# Altium PCB Layout.PcbDoc
Units mil, origin at the board's own origin, x right, y up, seen from the top; angles counter-clockwise.
Board outline 1385.83 x 2275 mil, 2 copper layers (Top Layer, Bottom Layer); 27 components, 50 nets, 138 pads, 73 vias.
Unrouted connection lines stored in the file: 1.
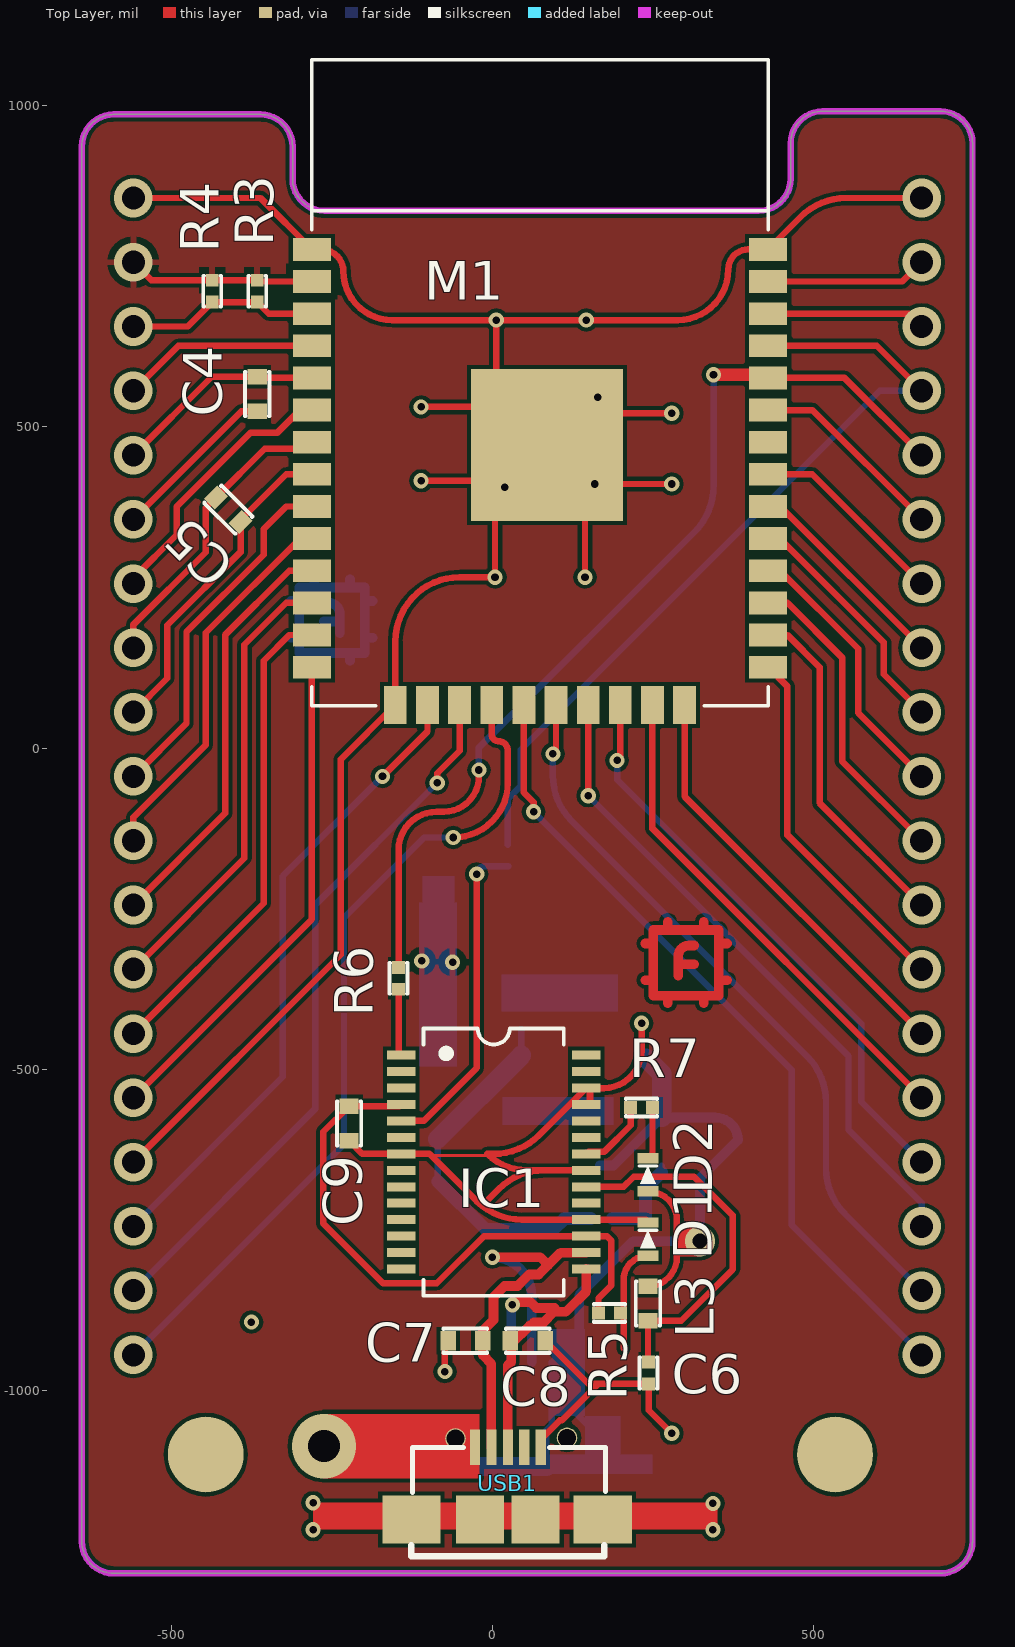
[diagram p0: Top Layer view]
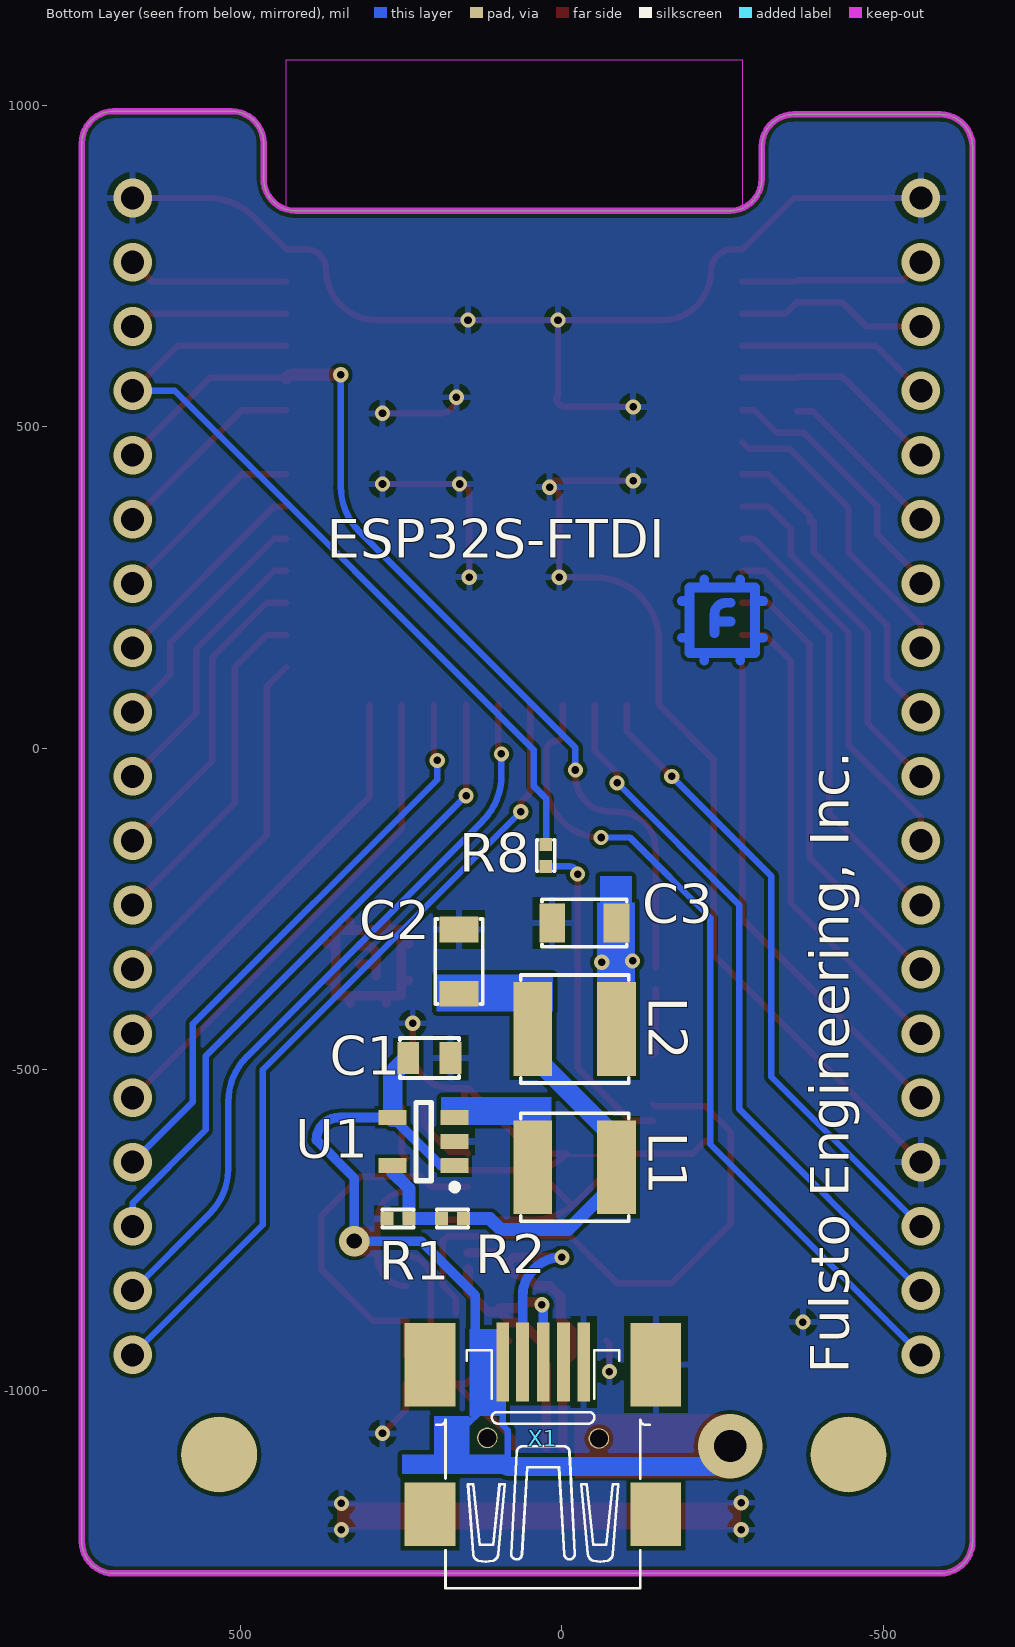
[diagram p1: Bottom Layer view, seen from below]
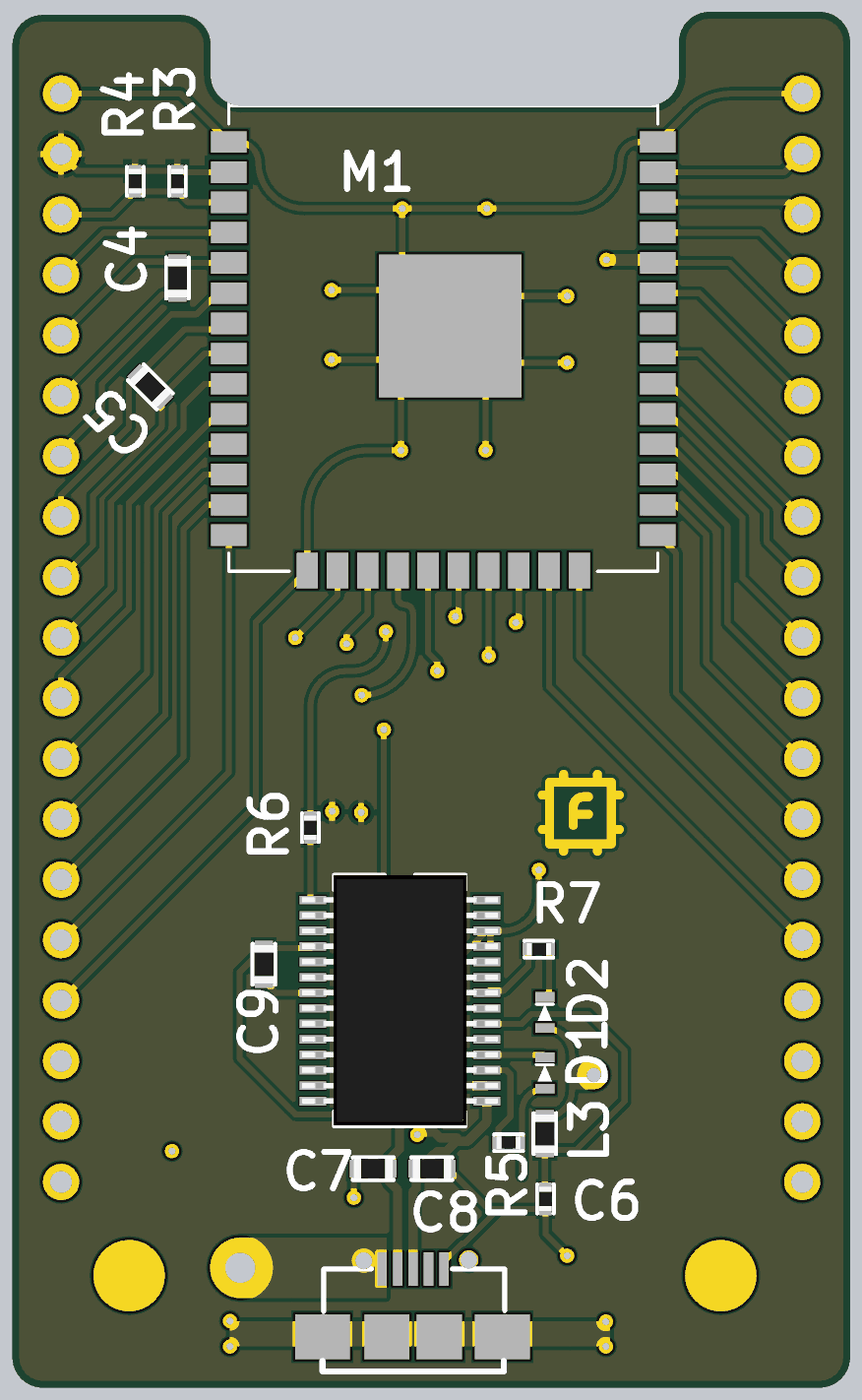
[diagram p2: 3D render of the assembled board from above, using the file's embedded part models]
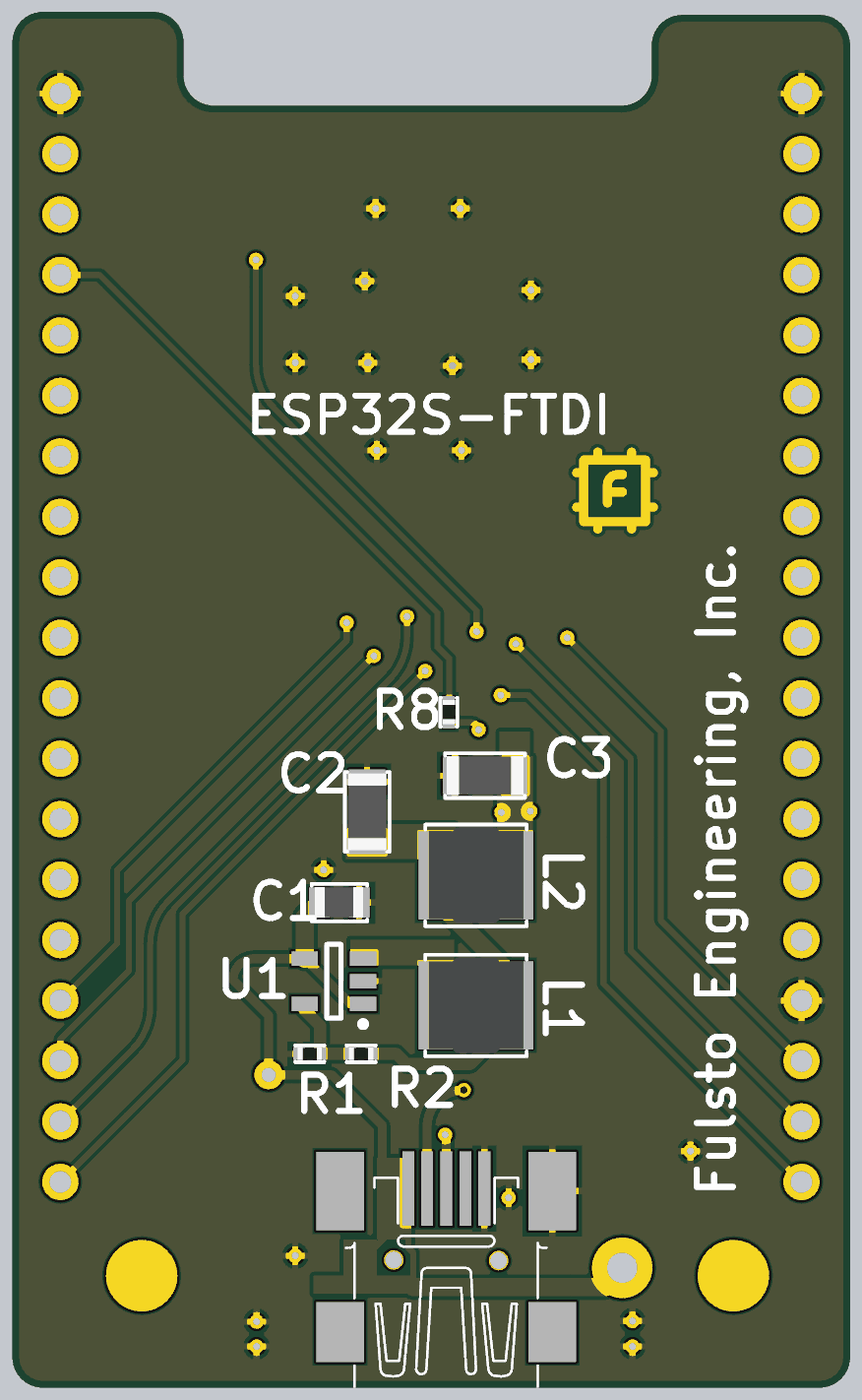
[diagram p3: 3D render of the assembled board from below, using the file's embedded part models]

## Layer stack, top to bottom
Top Solder: solder mask 0.4, Solder Resist, Dk 3.5
Top Layer: signal copper 1.4
Dielectric 1: dielectric 12.6, FR-4, Dk 4.8
Bottom Layer: signal copper 1.4
Bottom Solder: solder mask 0.4, Solder Resist, Dk 3.5

## Board outline
-638.91,-1234 -638.91,936 cw(c-588.91,936) -588.91,986 -361,986 cw(c-361,936) -311,936 -311,886 ccw(c-261,886) -261,836 414,836 ccw(c414,886) 464,886 464,941 cw(c514,941) 514,991 696.91,991 cw(c696.91,941) 746.91,941 746.91,-1234 cw(c696.91,-1234) 696.91,-1284 -588.91,-1284 cw(c-588.91,-1234)

## Design rules (kind name [scope] priority, off if disabled: settings)
Clearance [All] p1: gap=6
DiffPairsRouting [All] p1: maxlimit=10 minlimit=10 mostfreqgap=10 toplayer_minwidth=15 toplayer_maxwidth=15 toplayer_prefwidth=15 bottomlayer_minwidth=15 bottomlayer_maxwidth=15 bottomlayer_prefwidth=15 maxuncoupledlength=500
PolygonConnect [All] p1: connectstyle=Relief reliefconductorwidth=10 reliefentries=4 polygonreliefangle="90 Angle" airgapwidth=10
RoutingVias [All] p1: holewidth=11.81 width=23.62 viastyle="Through Hole" minholewidth=11.81 minwidth=11.81 maxholewidth=236.22 maxwidth=118.11
SolderMaskExpansion [All] p1: expansion=4
Width [All] p1: maxlimit=3897.64 minlimit=10 preferedwidth=10 minimp=50.000000 maximp=50.000000 favimp=50.000000
29 further rules are at their usual default settings.

## Classes and differential pairs
differential pair USB: +USB_P -USB_N

## Components (designator, comment, footprint, x,y, rotation, side; value= is the part's Value field where it differs from the comment)
C1 "4.7µF" 0805NT 206,-482 r270 bottom
C2 "22µF" 1206NT 160,-332 r0 bottom
C3 "22µF" 1206NT -35,-272 r270 bottom
C4 "270pF" 0603NT -366,551 r0 top
C5 "270pF" 0603NT -411,371 r225 top
C6 "1uF" 0402NT 243,-972 r0 top
C7 "47pF" 0603NT -42,-922 r270 top
C8 "47pF" 0603NT 55,-922 r90 top
C9 "0.1uF" 0603NT -223,-584 r0 top
D1 "SMT_LED" 0603(IN)LED 242,-764 r90 top
D2 "SMT_LED" 0603(IN)LED 242,-664 r90 top
IC1 "FT232R" SSOP-28 2,-644 r0 top
L1 "2.2µH" IND-NR4018 -20,-652 r90 bottom
L2 "2.2µH" IND-NR4018 -20,-437 r90 bottom
L3 "Z=1.5k" 0603NT 242,-864 r0 top
M1 "ESP32S_Module" ESP32S -281,66 r0 top
R1 "30kΩ" 0402NT 255,-732 r90 bottom
R2 "135kΩ" 0402NT 170,-732 r90 bottom
R3 "1K" 0402NT -436,711 r0 top
R4 "1K" 0402NT -366,711 r0 top
R5 "1KΩ" 0402NT 182,-879 r270 top
R6 "1k" 0402NT -146,-358 r180 top
R7 "1k" 0402NT 232,-559 r270 top
R8 "1k" 0402NT 25,-167 r0 bottom
U1 "AP3418K" "AP3418K SOT25" 215,-612 r0 bottom
USB1 "µUSB AB" "Micro USB A/B" 24,-1200 r0 top
X1 "MINI-USB-32005-201" 32005-201 29,-1074 r90 bottom

## Footprints (in the part's own frame and the unit in brackets; to place one, negate y for a bottom-side part, rotate by r counter-clockwise, add the part's x,y. Pads: shape width x height; smd on the part's side, far side on the other; paste and mask are expansions set on the pad)
0402NT [mil]
  rect 20x20 smd mask+2: 1(0,17) 2(0,-17)
  silkscreen extent -14,-24 14,24, body extent -10,-20 10,20, height 14
0603(IN)LED [mil] "0603(IN)LED"
  rect 16x32 smd: P$1(-25.59,0) P$2(26,0)
  silkscreen extent -14,-14 14,14, body extent -30,-19 30,19, height 20
0603NT [mil]
  rect 30x24 smd mask+2: 1(0,27) 2(0,-27)
  silkscreen extent -19,-34 19,34, body extent -16,-32 16,32, height 18
0805NT [mil]
  rect 50x34 smd mask+2: 1(0,33) 2(0,-33)
  silkscreen extent -31,-46 31,46, body extent -26,-41 24,39, height 24
1206NT [mil]
  rect 60x40 smd: 1(0,50) 2(0,-50)
  silkscreen extent -37,-66 37,66, body extent -32,-63 32,63, height 24
32005-201 [mil] "32005-201"
  rect 123x20 smd: 1(119,63) 2(119,32) 3(119,0) 4(119,-31.5) 5(119,-62.99)
  rect 99x79 smd: M1(-118.11,-175.2) M2(-118.11,176)
  rect 130x79 smd: M3(115,176) M4(115,-175.2)
  round 32 hole 28: P$1(1,87) P$2(-0.1,-86.52)
  silkscreen extent -233,-166 137,166
"AP3418K SOT25" [mm] "SOT23, 5-Leads, Body 2.96x2.82mm, Pitch 0.95mm, IPC Medium Density"
  rect 1.1x0.6 smd: 1(-1.225,0.95) 2(-1.225,0) 3(-1.225,-0.95) 4(1.225,-0.95) 5(1.225,0.95)
  silkscreen extent -1.35,-1.55 0.3,1.92, body extent -0.85,-1.55 0.85,1.55, height 1.45
ESP32S [mm] "ESP32S-Module"
  rect 1.5x0.9 smd: 1(0,18.034) 2(0,16.764) 3(0,15.494) 4(0,14.224) 5(0,12.954) 6(0,11.684) 7(0,10.414) 8(0,9.144) 9(0,7.874) 10(0,6.604) 11(0,5.334) 12(0,4.064) 13(0,2.794) 14(0,1.524) 25(18.034,1.524) 26(18.034,2.794) 27(18.034,4.064) 28(18.034,5.334) 29(18.034,6.604) 30(18.034,7.874) 31(18.034,9.144) 32(18.034,10.414) 33(18.034,11.684) 34(18.034,12.954) 35(18.034,14.224) 36(18.034,15.494) 37(18.034,16.764) 38(18.034,18.034)
  rect 0.9x1.5 smd: 15(3.3,0.034) 16(4.57,0.034) 17(5.84,0.034) 18(7.11,0.034) 19(8.38,0.034) 20(9.65,0.034) 21(10.92,0.034) 22(12.19,0.034) 23(13.46,0.034) 24(14.73,0.034)
  rect 6x6 smd: 101(9.3,10.3)
  Keep-Out Layer region: 0,19.558 18.034,19.558 18.034,25.527 0,25.527
  silkscreen extent 0,0 18.03,25.53, body extent 0,0 18.03,25.53, height 2
IND-NR4018 [mil] "Power Inductance  TAIYO YUDEN"
  rect 146x60 smd paste+0 mask+2: 1(0,65) 2(0,-65)
  silkscreen extent -84,-84 84,84, body extent -79,-79 79,79, height 70
"Micro USB A/B" [mm]
  rect 0.4x1.4 smd: 1(-1.3,2.85) 2(-0.65,2.85) 3(0,2.85) 4(0.65,2.85) 5(1.3,2.85)
  rect 2.3x1.9 smd: 5(-3.81,0) 5(3.75,0)
  rect 1.9x1.9 smd: 5(-1.1,0) 5(1.1,0)
  silkscreen extent -3.81,-1.45 3.85,2.85, body extent -4.44,-2.92 4.44,2.85, height 2.05
SSOP-28 [mil]
  rect 44x14 smd mask+2: 1(-144,166.4) 2(-144,140.8) 3(-144,115.2) 4(-144,89.6) 5(-144,64) 6(-144,38.4) 7(-144,12.8) 8(-144,-12.8) 9(-144,-38.4) 10(-144,-64) 11(-144,-89.6) 12(-144,-115.2) 13(-144,-140.8) 14(-144,-166.4) 15(144,-166.4) 16(144,-140.8) 17(144,-115.2) 18(144,-89.6) 19(144,-64) 20(144,-38.4) 21(144,-12.8) 22(144,12.8) 23(144,38.4) 24(144,64) 25(144,89.6) 26(144,115.2) 27(144,140.8) 28(144,166.4)
  silkscreen extent -109,-208 109,208, body extent -161,-206 162,207, height 76

## Part data
C1 C2 C3 C4 C5 C6 C7 C8 C9: library part CAP, "Capacitor"
IC1: library part FT232RL, "IC Logic Comm"
L1 L2: library part IND-POWER, "Inductance Power"
L3: library part IND_BEAD, "Inductance Bead"
M1: "Esp-32S"
R1 R2 R5: library part ResNico
R3 R4 R6 R7 R8: library part RES, "Resistance"
USB1: library part "Micro USB A/B"
X1: "<b>MINI USB-B Conector</b><p> / Source: www.cypressindustries.com"

## Free pads (board coordinates)
  round 118.11 all layers, no hole: 0(-446,-1099) 0(533.13,-1099)

## Via types
v1: diameter 60, hole 36, Top Layer to Bottom Layer, 38 vias
v2: diameter 23.62, hole 11.81, Top Layer to Bottom Layer, 33 vias
v3: diameter 100, hole 50, Top Layer to Bottom Layer, 1 vias
v4: diameter 47.24, hole 23.62, Top Layer to Bottom Layer, 1 vias

## Nets (pads, with @x,y where several pads share a name; then routed paths per layer and width w, separated by ;. In a path a pad name is that pad's centre, name@x,y a point inside that pad or via, vN(x,y) a via of type N, cw(c..) or ccw(c..) an arc to the next point about the centre after c; other vN are vias at no path point)
3V3: C3.1 L2.2 M1.2 R3.1 R4.1 | length 290
  Top Layer w10: v1(-558.56,756) -530.56,728 R3.1 R4.1 -364,726 M1.2
  other v2: -62,-333 -110,-331
5V: C1.2 D2.P$1 L3.1 U1.1 U1.4 USB1.1 X1.1 X1.P$2 | length 1820
  Top Layer w10: L3.1 ccw(c242,-792) 287,-792 287,-734.59 ccw(c242,-734.59) D2.P$1
  Bottom Layer w10: 84,-1119 154,-1119 189,-1084 179,-1084 X1.1@94,-999 ; 84,-1117.85 84,-1061.38 92,-1053.38 X1.1
  Bottom Layer w15: 136,-922 135,-921 135,-851 219,-767 v4(323,-767) 323,-669 382,-610 ccw(c346.6,-610) 346.6,-574.6 U1.4 188.43,-649.4 U1.1
  Bottom Layer w29.53: v3@-264.5,-1088.5 -235.15,-1117.85 84,-1117.85
  Bottom Layer w30: C1.2 263.23,-506.23 U1.4
  other v3: -262,-1086
CBUS1: IC1.22 R7.2 | length 115.2
  Top Layer w10: IC1.22 149.6,-627.6 174.21,-627.6 215,-586.81 R7.2
CLK: M1.20 | length 1138.1
  Top Layer w10: v2(94,-9) 98.92,-4.08 M1.20
  Bottom Layer w10: v2(94,-9) 94,-42.58 ccw(c194,-42.58) 123.29,-113.29 489.71,-479.71 cw(c419,-550.42) 519,-550.42 519,-653.8 ccw(c619,-653.8) 548.29,-724.51 v1(667.78,-844)
CMD: M1.19 | length 1267.7
  Top Layer w10: M1.19 48.92,-68.92 64,-84 v2(64,-99)
  Bottom Layer w10: v2(64,-99) 465.39,-500.39 465.39,-741.61 v1(667.78,-944)
EN: M1.3 R3.2 R4.2 | length 300.8
  Top Layer w10: v1(-558.56,656) -474,656 R3.2 R4.2 -348,676 M1.3
FRX-ESPTX: M1.35 R8.2 | length 1278.7
  Top Layer w10: M1.35 597.78,626 v1(667.78,556)
  Bottom Layer w10: R8.2@24,-150 24,-79 44,-59 44,-2.43 602.43,556 v1(667.78,556)
FTX-ESPRX: M1.34 R6.2 | length 1519.8
  Top Layer w10: R6.2 -146,-158 cw(c-87,-158) -87,-99 -76,-99 ccw(c-76,-44) -21,-44 v2(-21,-34) ; M1.34 547.78,576 v1(667.78,456)
  Top Layer w19.68: v2(344,581) 416.93,581 cw(c416.93,563.93) M1.34
  Bottom Layer w10: v2(-21,-34) -21,1 314.71,336.71 ccw(c244,407.42) 344,407.42 v2(344,581)
GND: C1.1 C2.2 C3.2 C6.2 C7.2 C8.2 C9.2 D1.P$2 IC1.7 IC1.18 IC1.21 IC1.25 IC1.26 M1.1 M1.15 M1.38 M1.101 R1.1 U1.2 USB1.5 X1.5 X1.M4 | length 5154.4
  Top Layer w10: v1(-558.56,-644) -236,-321.44 -236,-17.58 M1.15 -151.08,166 cw(c-51.08,166) -51.08,266 v2(4,266) 4,391 cw(c19,391) v2(19,406) ccw(c9,406) 9,416 v2(-111,416) ; v1(-558.56,856) -361,856 M1.1 -266,776 cw(c-266,742) -232,742 ccw(c-156,742) -156,666 v2(6,666) ; C9.2 -202.8,-631.2 IC1.7 -98,-631.2 -24.89,-704.31 ccw(c45.82,-633.6) -16.35,-711.92 ; v2(-111,531) -6,531 ccw(c-6,546) 9,546 cw(c9,549) 6,549 v2(6,666) ; v2(-74,-970) -74,-927 C7.2 ; USB1.5@75.18,-1087.8 75.18,-1075.64 104.82,-1046 108,-1046 165,-989 ; C8.2 149,-989 165,-989 ; v2(144,266) 144,396 cw(c159,396) v2(159,411) v2(279,411) ; IC1.21 80.19,-656.8 ; v2(164,546) ccw(c189,546) 189,521 v2(279,521) ; v2(232,-428) 232,-470 cw(c173.2,-470) 173.2,-528.8 IC1.26 72.89,-601.91 cw(c2.18,-531.2) 2.18,-631.2 -8,-631.2 ccw(c53.8,-569.4) 53.8,-656.8 80.19,-656.8 ; D1.P$2 ccw(c237.6,-738) 237.6,-733.6 IC1.18 45.82,-733.6 cw(c45.82,-633.6) -16.35,-711.92 ; v2(279,-1066) 243,-1030 C6.2 165,-989 ; v1(667.78,856) 550.42,856 ccw(c550.42,756) 479.71,826.71 M1.38 398,776 ccw(c398,745) 367,745 cw(c288,745) 288,666 v2(146,666) v2(6,666) ; -16.35,-711.92 9.48,-686.09 cw(c80.19,-756.8) 80.19,-656.8
  other v2: -279,-1216 343,-1216 343,-1175 -279,-1174 -375,-893
IO0: M1.25 | length 568.9
  Top Layer w10: M1.25 459,96 459,-135.22 v1(667.78,-344)
IO2: M1.24 | length 664.1
  Top Layer w10: M1.24 298.92,-75.14 v1(667.78,-444)
IO4: M1.26 | length 536.5
  Top Layer w10: M1.26 459,176 509,126 509,-85.22 v1(667.78,-244)
IO5: M1.29 | length 379.7
  Top Layer w10: M1.29 447.46,326 609,164.46 609,114.78 v1(667.78,56)
IO6: C4.2 | length 262.1
  Top Layer w10: v1(-558.56,356) -390.56,524 C4.2
IO12: M1.14 | length 785
  Top Layer w10: v1(-558.56,-544) -281,-266.44 M1.14
IO13: M1.16 | length 1000.8
  Top Layer w10: v2(-171,-44) -101.08,25.92 M1.16
  Bottom Layer w10: v1(-558.56,-744) -326,-511.44 -326,-199 v2(-171,-44)
IO14: M1.13 | length 755.5
  Top Layer w10: v1(-558.56,-444) -356,-241.44 -356,136 -316,176 M1.13
IO15: M1.23 | length 784.8
  Top Layer w10: M1.23 248.92,-125.14 v1(667.78,-544)
IO16: M1.27 | length 486.5
  Top Layer w10: M1.27 459,226 544,141 544,-20.22 v1(667.78,-144)
IO17: M1.28 | length 429.7
  Top Layer w10: M1.28 447.46,276 569,154.46 569,54.78 v1(667.78,-44)
IO18: M1.30 | length 329.9
  Top Layer w10: M1.30 447.78,376 v1(667.78,156)
IO19: M1.31 | length 309.2
  Top Layer w10: M1.31 497.78,426 v1(667.78,256)
IO21: M1.33 | length 309.2
  Top Layer w10: M1.33 497.78,526 v1(667.78,356)
IO22: M1.36 | length 247.1
  Top Layer w10: M1.36 647.78,676 v1(667.78,656)
IO23: M1.37 | length 251.2
  Top Layer w10: M1.37 637.78,726 v1(667.78,756)
IO25: M1.10 | length 595.8
  Top Layer w10: v1(-558.56,-144) -558.56,-107.64 -446,4.92 -446,179.46 -299.46,326 M1.10
IO26: M1.11 | length 655.5
  Top Layer w10: v1(-558.56,-244) -416,-101.44 -416,176 -316,276 M1.11
IO27: M1.12 | length 708.4
  Top Layer w10: v1(-558.56,-344) -386,-171.44 -386,161 -321,226 M1.12
IO32: C5.1 M1.8 | length 506
  Top Layer w10: v1(-558.56,56) -506,108.56 -506,191 -391.91,305.09 C5.1 ; C5.1@-386,351.91 -386,361 -321,426 M1.8
IO33: M1.9 | length 558.4
  Top Layer w10: v1(-558.56,-44) -476,38.56 -476,181 -356,301 -356,341 -321,376 M1.9
IO34: M1.6 | length 420.1
  Top Layer w10: v1(-558.56,256) -558.56,264.65 -491,332.21 -491,376 -376,491 -334.46,491 -299.46,526 M1.6
NC: M1.32
NetC2_1: C2.1 L1.2 L2.1 R2.2 | length 567
  Bottom Layer w10: L1.2@-85,-674 L1.2 L1.2@-85,-608 ; L2.1@45,-478 L2.1
  Bottom Layer w20: L1.2@-85,-674 -10,-749 95,-749 112,-732 R2.2
  Bottom Layer w30: L1.2@-85,-608 L2.1@45,-478
NetC5_2: C5.2 M1.7 | length 472
  Top Layer w10: v1(-558.56,156) -558.56,192.36 -446,304.92 -446,374.18 C5.2 -354.18,466 -291,466 M1.7
NetC6_1: C6.1 IC1.20 L3.2 | length 563.7
  Top Layer w10: IC1.20 203.98,-682.4 219.79,-666.59 313.59,-666.59 374,-727 374,-811 294,-891 L3.2 C6.1@242,-946
NetC9_1: C9.1 IC1.4 IC1.17 R5.2 | length 922.2
  Top Layer w10: IC1.4 -144.6,-557 C9.1 -263,-597 -263,-739.61 -170.21,-832.4 -86.6,-832.4 -86.5,-832.5 -13.2,-759.2 IC1.17 178.2,-759.2 185,-766 185,-836 165,-856 R5.2
NetD1_P$1: D1.P$1 R5.1 | length 166.1
  Top Layer w10: 204,-934 204,-827.59 cw(c242,-827.59) D1.P$1
NetD2_P$2: D2.P$2 R7.1 | length 81.9
  Top Layer w10: D2.P$2 249,-631 R7.1
NetIC1_1: IC1.1 R6.1 | length 104.3
  Top Layer w10: R6.1 -146,-473.6 IC1.1
NetIC1_5: IC1.5 R8.1 | length 509.5
  Top Layer w10: IC1.5 -107,-580 -24.5,-497.5 v2(-24.5,-196)
  Bottom Layer w10: v2(-24.5,-196) cw(c-12.5,-196) -12.5,-184 R8.1
NetL1_1: L1.1 U1.3
NetR1_2: R1.2 R2.1 U1.5 | length 144
  Bottom Layer w10: U1.5@263.23,-659.77 U1.5
  Bottom Layer w20: R2.1 R1.2 238,-685 U1.5@263.23,-659.77
SD0: M1.21 | length 1026.3
  Top Layer w10: M1.21 148.92,-73.92 v2(149,-74)
  Bottom Layer w10: v2(149,-74) 554,-479 554,-593.86 667.78,-707.64 v1(667.78,-744)
SD1: M1.22 | length 909.6
  Top Layer w10: v2(194,-19) 198.92,-14.08 M1.22
  Bottom Layer w10: v2(194,-19) 194,-49 574,-429 574,-550.22 v1(667.78,-644)
SD2: M1.17 | length 1121.5
  Top Layer w10: v2(-86,-54) -86,-38.84 -51.08,-3.92 M1.17
  Bottom Layer w10: v1(-558.56,-844) -276,-561.44 -276,-244 v2(-86,-54)
SD3: M1.18 | length 1306.6
  Top Layer w10: v2(-61,-139) ccw(c-61,-54) 24,-54 24,-4 ccw(c9,-4) 9,11 cw(c9,21.08) -1.08,21.08 M1.18
  Bottom Layer w10: v1(-558.56,-944) -231,-616.44 -231,-264 -106,-139 v2(-61,-139)
SENSOR_VN: C4.1 M1.5 | length 328.9
  Top Layer w10: v1(-558.56,456) -436.56,578 C4.1 -364,576 M1.5
SENSOR_VP: M1.4 | length 306.6
  Top Layer w10: v1(-558.56,556) -488.56,626 M1.4
USB_N: C7.1 IC1.16 USB1.2 X1.2 | length 709.3
  Top Layer w15: USB1.2 -1.59,-957.91 -15,-944.5 C7.1 -15,-906 1.5,-889.5 1.69,-889.69 1.69,-853.86 18.86,-836.69 39.31,-836.69 57,-819 72,-819 86.7,-804.3 ; v2(0,-792) 74.39,-792 86.7,-804.3 ; IC1.16 106.2,-784.8 86.7,-804.3
  Bottom Layer w15: v2(0,-792) cw(c0,-853) 61,-853 X1.2
USB_P: C8.1 IC1.15 USB1.3 X1.3 | length 508.4
  Top Layer w15: USB1.3 24,-960 29,-955 29,-927.4 58.25,-898.15 59.76,-898.15 64.41,-893.5 79.5,-893.5 96.12,-876.88 114.12,-876.88 146,-845 IC1.15 ; v2(31,-866) 35.38,-861.62 58.88,-861.62 68.25,-871 96.5,-871
  Bottom Layer w15: X1.3 v2@29,-866
pads on no net: IC1.2 IC1.3 IC1.6 IC1.8 IC1.9 IC1.10 IC1.11 IC1.12 IC1.13 IC1.14 IC1.19 IC1.23 IC1.24 IC1.27 IC1.28 USB1.4 X1.4 X1.M1 X1.M2 X1.M3 X1.P$1
copper on no net: | length 1195.4
  Top Layer w15: 238,-361 250,-361 ; 238,-304 250,-304 ; 273,-397 273,-385 ; 273,-283 273,-270 ; 289,-354 289,-324 cw(c306,-324) 306,-307 314,-307 ; 289,-336 314,-336 ; 329,-397 329,-385 ; 329,-283 329,-270 ; 352,-361 365,-361 ; 352,-304 365,-304 ; 250,-385 250,-283 352,-283 352,-385 250,-385
  Bottom Layer w15: -313.5,172 -300.5,172 ; -313.5,229 -300.5,229 ; -277.5,136 -277.5,148 ; -277.5,250 -277.5,263 ; -262.5,197 -237.5,197 ; -262.5,226 -254.5,226 cw(c-254.5,209) -237.5,209 -237.5,179 ; -221.5,136 -221.5,148 ; -221.5,250 -221.5,263 ; -198.5,172 -186.5,172 ; -198.5,229 -186.5,229 ; -300.5,148 -300.5,250 -198.5,250 -198.5,148 -300.5,148

## Polygon pours and split planes (outlines as drawn)
3V3 on Top Layer "Bottom Layer-No Net" (solid, pour order 8): -647.06,-1247.81 -647.06,934.98 cw(c-602.5,934.98) -602.5,979.54 -361.53,979.54 cw(c-361.53,936.71) -318.7,936.71 -318.7,875.83 ccw(c-282.06,875.83) -282.06,839.19 415.94,839.19 ccw(c415.94,880.19) 456.94,880.19 456.94,935.19 cw(c506.94,935.19) 506.94,985.19 689.86,985.19 cw(c689.86,935.19) 739.86,935.19 739.86,-1239.81 cw(c689.86,-1239.81) 689.86,-1289.81 -601.86,-1289.81 cw(c-601.86,-1246.34) -645.33,-1246.34
GND on Bottom Layer "Bottom Layer-No Net" (solid, pour order 7): -637.06,-1242.03 -637.06,940.77 cw(c-592.5,940.77) -592.5,985.33 -351.53,985.33 cw(c-351.53,942.5) -308.7,942.5 -308.7,881.61 ccw(c-272.06,881.61) -272.06,844.97 425.94,844.97 ccw(c425.94,885.97) 466.94,885.97 466.94,940.97 cw(c516.94,940.97) 516.94,990.97 699.86,990.97 cw(c699.86,940.97) 749.86,940.97 749.86,-1234.03 cw(c699.86,-1234.03) 699.86,-1284.03 -591.86,-1284.03 cw(c-591.86,-1240.56) -635.33,-1240.56

## Keep-outs
Keep-Out Layer:
  lines w10: -638.91,-1234 ccw(c-588.91,-1234) -588.91,-1284 696.91,-1284 ccw(c696.91,-1234) 746.91,-1234 746.91,-1179 746.91,919.07 746.91,941 ccw(c696.91,941) 696.91,991 514,991 ccw(c514,941) 464,941 464,886 cw(c414,886) 414,836 -261,836 cw(c-261,886) -311,886 -311,936 ccw(c-361,936) -361,986 -588.91,986 ccw(c-588.91,936) -638.91,936 -638.91,919.07 -638.91,-1174 -638.91,-1234

## Other copper
Top Layer:
  rectangle net GND: 146,-559 157,-528.8
  rectangle net 5V: -264,-1136 -20,-1036
  rectangle net GND: -279,-1216 350,-1174
  rectangle net 5V: 288,-791 324,-744
  rectangle net GND: -98,-636 1,-631.2
Bottom Layer:
  rectangle net 5V: 92,-1039 144,-904
  rectangle net 5V: 144,-1119 199,-1039
  rectangle net 5V: 84,-1119 154,-1104
  rectangle net 5V: 79,-1129 249,-1099
  rectangle net 3V3: -109,-301 -59,-199
  rectangle net NetC2_1: 14,-410 195,-352
  rectangle net NetL1_1: 16,-586 188,-543
  rectangle net 3V3: -114,-495 -55,-240

## Silkscreen, mask and mechanical layers (free items; w line width, h text height)
Bottom Overlay:
  text "ESP32S-FTDI" at 366,296 h60
  text "Fulsto Engineering, Inc." at -446,-973 h60 r270
Top Solder:
  lines w15: 250,-385 352,-385 ; 250,-385 250,-283 ; 250,-385 250,-283 ; 250,-385 352,-385 ; 250,-283 352,-283 ; 250,-283 352,-283 ; 289,-324 cw(c306,-324) 306,-307 ; 289,-324 cw(c306,-324) 306,-307 ; 289,-324 289,-354 289,-324 ; 306,-307 314,-307 306,-307 ; 352,-385 352,-283 ; 352,-385 352,-283 ; 238,-361 250,-361 238,-361 ; 238,-304 250,-304 238,-304 ; 273,-397 273,-385 273,-397 ; 273,-283 273,-270 273,-283 ; 289,-336 314,-336 289,-336 ; 329,-397 329,-385 329,-397 ; 329,-283 329,-270 329,-283 ; 352,-361 365,-361 352,-361 ; 352,-304 365,-304 352,-304
Bottom Solder:
  lines w15: -300.5,148 -198.5,148 ; -300.5,148 -300.5,250 ; -300.5,148 -198.5,148 ; -300.5,148 -300.5,250 ; -300.5,250 -198.5,250 ; -300.5,250 -198.5,250 ; -254.5,226 cw(c-254.5,209) -237.5,209 ; -254.5,226 cw(c-254.5,209) -237.5,209 ; -254.5,226 -262.5,226 -254.5,226 ; -237.5,209 -237.5,179 -237.5,209 ; -198.5,148 -198.5,250 ; -198.5,148 -198.5,250 ; -313.5,172 -300.5,172 -313.5,172 ; -313.5,229 -300.5,229 -313.5,229 ; -277.5,136 -277.5,148 -277.5,136 ; -277.5,250 -277.5,263 -277.5,250 ; -262.5,197 -237.5,197 -262.5,197 ; -221.5,136 -221.5,148 -221.5,136 ; -221.5,250 -221.5,263 -221.5,250 ; -198.5,172 -186.5,172 -198.5,172 ; -198.5,229 -186.5,229 -198.5,229

## Text inside footprints (layer, text, board x,y; h text height)
USB1: Mechanical 1 "Outside" at -36,-1320 h20.63